# EAGLE board CT_schematic (EAGLE 7.6.0)

Size 100 x 80 mm. Coordinates in mm from the lower left corner, seen from the top.
Outline: 0,0 100,0 100,80 0,80 0,0
Copper layers (1*16): Top 0.035mm / dielectric 1.5mm / Bottom 0.035mm
Design rules "default": minimum track width 10mil, minimum drill 24mil, track to track 8mil, track to pad 8mil, pad to pad 8mil, via to via 8mil, smd to smd 8mil, copper to edge 40mil, drill to drill 8mil, minimum pad ring 10mil, minimum via ring 8mil, stop-mask expansion 4mil, vias tented up to drill 0mil, thermal gap 10mil

## Footprints (pad centres in the part's own frame; a part is rotated, then mirrored left to right if it is on the bottom)
C0603 = smd 0.8 x 0.8: 1 -0.762,0; 2 0.762,0
C0402 = smd 0.5 x 0.5: 1 -0.508,0; 2 0.508,0
EXV-9B = smd 2.718 x 1.778: 1 -2.108,0; 2 2.108,0
C1206 = smd 1.3 x 1.6: 1 -1.524,0; 2 1.524,0
L0603 = smd 0.8 x 0.8: 1 -0.762,0; 2 0.762,0
L1210 = smd 1.2 x 2.5: 1 -1.524,0; 2 1.524,0
R0603 = smd 0.8 x 0.8: 1 -0.762,0; 2 0.762,0
LQFP64 = smd 0.3 x 1.2: 1 -3.75,-5.75; 2 -3.25,-5.75; 3 -2.75,-5.75; 4 -2.25,-5.75; 5 -1.75,-5.75; 6 -1.25,-5.75; 7 -0.75,-5.75; 8 -0.25,-5.75; 9 0.25,-5.75; 10 0.75,-5.75; 11 1.25,-5.75; 12 1.75,-5.75; 13 2.25,-5.75; 14 2.75,-5.75; 15 3.25,-5.75; 16 3.75,-5.75; 33 3.75,5.75; 34 3.25,5.75; 35 2.75,5.75; 36 2.25,5.75; 37 1.75,5.75; 38 1.25,5.75; 39 0.75,5.75; 40 0.25,5.75; 41 -0.25,5.75; 42 -0.75,5.75; 43 -1.25,5.75; 44 -1.75,5.75; 45 -2.25,5.75; 46 -2.75,5.75; 47 -3.25,5.75; 48 -3.75,5.75 | smd 1.2 x 0.3: 17 5.75,-3.75; 18 5.75,-3.25; 19 5.75,-2.75; 20 5.75,-2.25; 21 5.75,-1.75; 22 5.75,-1.25; 23 5.75,-0.75; 24 5.75,-0.25; 25 5.75,0.25; 26 5.75,0.75; 27 5.75,1.25; 28 5.75,1.75; 29 5.75,2.25; 30 5.75,2.75; 31 5.75,3.25; 32 5.75,3.75; 49 -5.75,3.75; 50 -5.75,3.25; 51 -5.75,2.75; 52 -5.75,2.25; 53 -5.75,1.75; 54 -5.75,1.25; 55 -5.75,0.75; 56 -5.75,0.25; 57 -5.75,-0.25; 58 -5.75,-0.75; 59 -5.75,-1.25; 60 -5.75,-1.75; 61 -5.75,-2.25; 62 -5.75,-2.75; 63 -5.75,-3.25; 64 -5.75,-3.75
SSOP-16 = smd 1.981 x 0.356: 1 -2.464,2.223; 2 -2.464,1.587; 3 -2.464,0.953; 4 -2.464,0.318; 5 -2.464,-0.318; 6 -2.464,-0.953; 7 -2.464,-1.587; 8 -2.464,-2.223; 9 2.464,-2.223; 10 2.464,-1.587; 11 2.464,-0.953; 12 2.464,-0.318; 13 2.464,0.318; 14 2.464,0.953; 15 2.464,1.587; 16 2.464,2.223
182-009-MALE = drill 1.194 pad 1.524 octagon: 1 -5.537,10.923; 2 -2.769,10.923; 3 0,10.923; 4 2.769,10.923; 5 5.537,10.923; 6 -4.153,8.08; 7 -1.384,8.08; 8 1.384,8.08; 9 4.153,8.08 | hole 3.048: -12.446,9.501; 12.446,9.501
DFN-10 = smd 0.965 x 0.305: 1 -1.321,1; 2 -1.321,0.5; 3 -1.321,0; 4 -1.321,-0.5; 5 -1.321,-1; 6 1.321,-1; 7 1.321,-0.5; 8 1.321,0; 9 1.321,0.5; 10 1.321,1
DFN-6 = smd 0.805 x 0.3: 1 -0.952,0.5; 2 -0.952,0; 3 -0.952,-0.5; 4 0.952,-0.5; 5 0.952,0; 6 0.952,0.5 | smd 0.61 x 1.42: 7 0,0
FCI_10118193-0001LF = smd 0.4 x 1.35: 1 -1.3,2.675; 2 -0.65,2.675; 3 0,2.675; 4 0.65,2.675; 5 1.3,2.675 | smd 1.6 x 1.4: 6 -3.2,2.45; 7 3.2,2.45 | smd 1.9 x 1.9: 8 -1.2,0; 9 1.2,0 | hole 0.5: -3.3,0; 3.3,0
SOT143B = smd 1 x 0.7: 1 -0.75,-1 | smd 0.6 x 0.7: 2 0.95,-1; 3 0.95,1; 4 -0.95,1
ABS07-32.768KHZ-7-T = smd 1.1 x 2.4: 1 -2.5,0; 2 0,0
ABLS-25.000MHZ-B2F-T = smd 5.6 x 2.8: 1 -3.81,0; 2 5.69,0
LP2954 = smd 1.6 x 0.6: 1 -2.475,1.905 | smd 1.55 x 0.6: 2 -2.475,0.635; 3 -2.475,-0.635; 4 -2.475,-1.905; 5 2.475,-1.905; 6 2.475,-0.635; 7 2.475,0.635; 8 2.475,1.905
DFN8_2X3MC = smd 0.813 x 0.305: 1 -1.398,0.75; 2 -1.398,0.25; 3 -1.398,-0.25; 4 -1.398,-0.75; 5 1.398,-0.75; 6 1.398,-0.25; 7 1.398,0.25; 8 1.398,0.75 | smd 1.753 x 1.549: 9 0,0
JST-2-SMD = smd 1 x 4.6: 1 -1,-3.7; 2 1,-3.7 | smd 1.6 x 3.4: NC1 -3.4,1.5; NC2 3.4,1.5
SON-6 = smd 0.55 x 0.3: 1 -0.355,0.5 | smd 0.52 x 0.3: 2 -0.37,0; 3 -0.37,-0.5; 4 0.37,-0.5; 5 0.37,0; 6 0.37,0.5
SW_4-1437565-2 = smd 1.4 x 2.1: 1 -2.23,4.55; 2 -2.23,-4.55; 3 2.23,4.55; 4 2.23,-4.55
LGM67K-G1J2-24-Z = smd 0.8 x 1.4: A -2,0; C 0,0
NC7SZ125M5X = smd 1.3 x 0.7: 1 -1.3,0.95; 2 -1.3,0; 3 -1.3,-0.95; 4 1.3,-0.95; 5 1.3,0.95
DUMMY_PACKAGE_144 = drill 0.3: 1 0,-1; 2 1.5,-1; 3 3,-1

## Placement (x,y rotation side)
C1  1e-07  [C0603]  -41.91,60.96 0 top  (outside the outline)
C2  1e-07  [C0603]  -45.72,60.96 0 top  (outside the outline)
C3  1e-07  [C0603]  -49.53,60.96 0 top  (outside the outline)
C4  1e-07  [C0603]  -53.34,60.96 0 top  (outside the outline)
C5  4.7e-06  [C0603]  -34.29,60.96 0 top  (outside the outline)
C6  1e-07  [C0603]  -57.15,60.96 0 top  (outside the outline)
C7  1e-08  [C0603]  -60.96,60.96 0 top  (outside the outline)
C8  1e-06  [C0603]  -64.77,60.96 0 top  (outside the outline)
C9  1e-11  [C0402]  -68.58,66.04 0 top  (outside the outline)
C10  1e-11  [C0402]  -15.24,71.12 0 top  (outside the outline)
C11  1e-11  [C0402]  -19.05,71.12 0 top  (outside the outline)
C12  1e-11  [C0402]  -22.86,71.12 0 top  (outside the outline)
C13  1e-06  [C0603]  -68.58,60.96 0 top  (outside the outline)
C14  1e-06  [C0603]  -15.24,66.04 0 top  (outside the outline)
C15  2.2e-07  [C0603]  -38.1,60.96 0 top  (outside the outline)
C16  1e-06  [C0603]  -19.05,66.04 0 top  (outside the outline)
C17  1e-06  [C0603]  -22.86,66.04 0 top  (outside the outline)
C18  1e-07  [C0402]  -26.67,71.12 0 top  (outside the outline)
C19  1e-07  [C0402]  -30.48,71.12 0 top  (outside the outline)
C20  1e-06  [C0603]  -26.67,66.04 0 top  (outside the outline)
C21  1e-07  [C0402]  -34.29,71.12 0 top  (outside the outline)
C22  1e-07  [C0402]  -38.1,71.12 0 top  (outside the outline)
C23  1e-07  [C0402]  -41.91,71.12 0 top  (outside the outline)
C24  1e-06  [EXV-9B]  -68.58,46.99 0 top  (outside the outline)
C25  2.2e-06  [EXV-9B]  -16.51,54.61 0 top  (outside the outline)
C26  1e-07  [C0402]  -45.72,71.12 0 top  (outside the outline)
C27  1e-05  [C1206]  -54.61,46.99 0 top  (outside the outline)
C28  1e-05  [C1206]  -60.96,46.99 0 top  (outside the outline)
C29  1e-08  [C0402]  -49.53,71.12 0 top  (outside the outline)
F1  240.0  [L0603]  -30.48,66.04 0 top  (outside the outline)
I1  1e-05  [L1210]  -48.26,46.99 0 top  (outside the outline)
R2  1000.0  [R0603]  -34.29,66.04 0 top  (outside the outline)
R4  4700.0  [R0603]  -38.1,66.04 0 top  (outside the outline)
R5  2200.0  [R0603]  -41.91,66.04 0 top  (outside the outline)
R6  2200.0  [R0603]  -45.72,66.04 0 top  (outside the outline)
R7  2200.0  [R0603]  -49.53,66.04 0 top  (outside the outline)
R8  2200.0  [R0603]  -53.34,66.04 0 top  (outside the outline)
R9  10000.0  [R0603]  -67.31,54.61 0 top  (outside the outline)
R10  100000.0  [R0603]  -36.83,54.61 0 top  (outside the outline)
R11  100000.0  [R0603]  -41.91,54.61 0 top  (outside the outline)
R12  100000.0  [R0603]  -46.99,54.61 0 top  (outside the outline)
R13  101022.32  [R0603]  -31.75,54.61 0 top  (outside the outline)
R14  100000.0  [R0603]  -52.07,54.61 0 top  (outside the outline)
R15  10000.0  [R0603]  -15.24,60.96 0 top  (outside the outline)
R16  10000.0  [R0603]  -20.32,60.96 0 top  (outside the outline)
R17  18000.0  [R0603]  -25.4,60.96 0 top  (outside the outline)
R18  470000.0  [R0603]  -57.15,54.61 0 top  (outside the outline)
R19  120000.0  [R0603]  -62.23,54.61 0 top  (outside the outline)
R20  2000.0  [R0603]  -57.15,66.04 0 top  (outside the outline)
R21  10000.0  [R0603]  -30.48,60.96 0 top  (outside the outline)
U1  STM32L152R8T6  [LQFP64]  -63.5,7.62 0 top  (outside the outline)
U2  LTC2804CGN-1#PBF  [SSOP-16]  -63.5,27.94 0 top  (outside the outline)
U3  182-009-113R531  [182-009-MALE]  -36.83,6.35 0 top  (outside the outline)
U4  MAG3110FCR1  [DFN-10]  -62.23,66.04 0 top  (outside the outline)
U5  SI7006-A20-IM  [DFN-6]  -71.12,69.85 0 top  (outside the outline)
U6  10118193-0001LF  [FCI_10118193-0001LF]  -35.56,38.1 0 top  (outside the outline)
U7  prtr5v0u2ax  [SOT143B]  -62.23,71.12 0 top  (outside the outline)
U8  ABS07-32.768KHZ-7-T  [ABS07-32.768KHZ-7-T]  -27.94,48.26 0 top  (outside the outline)
U9  ABLS-25.000MHZ-B2F-T  [ABLS-25.000MHZ-B2F-T]  -54.61,38.1 0 top  (outside the outline)
U10  LP2954AIMX/NOPB  [LP2954]  -25.4,39.37 0 top  (outside the outline)
U11  MCP73831T-2ACI/MC  [DFN8_2X3MC]  -20.32,74.93 0 top  (outside the outline)
U12  S2B-PH-SM4-TB(LF)(SN)  [JST-2-SMD]  -41.91,29.21 0 top  (outside the outline)
U13  TPS3895ADRYR  [SON-6]  -13.97,74.93 0 top  (outside the outline)
U14  4-1437565-2  [SW_4-1437565-2]  -27.94,27.94 0 top  (outside the outline)
U15  Q65110A2395  [LGM67K-G1J2-24-Z]  -36.83,46.99 0 top  (outside the outline)
U16  nc7sz125m5x  [NC7SZ125M5X]  -24.13,54.61 0 top  (outside the outline)
U17  Dummy  [DUMMY_PACKAGE_144]  -68.58,71.12 0 top  (outside the outline)

## Library data of the parts
C1-C29 F1 I1 R2 R4-R21 U1-U17 = circuit_tree

## Nets
CLK_CRYSTAL_U1_3: C9.1 U1.3 U8.1
CLK_CRYSTAL_U1_4: C10.1 U1.4 U8.2
CLK_CRYSTAL_U1_5: C11.1 U1.5 U9.1
CLK_CRYSTAL_U1_6: C12.1 U1.6 U9.2
GND: C1.2 C2.2 C3.2 C4.2 C5.2 C6.2 C7.2 C8.2 C9.2 C10.2 C11.2 C12.2 C13.2 C14.2 C16.2 C17.2 C18.2 C19.2 C20.2 C21.2 C22.2 C23.2 C24.2 C25.2 C26.2 C27.2 C28.2 C29.2 R2.2 R9.2 R14.2 R17.2 R19.2 R20.2 U1.12 U1.18 U1.31 U1.47 U1.63 U2.8 U3.5 U4.5 U4.10 U5.2 U5.7 U6.5 U6.6 U6.7 U6.8 U6.9 U7.1 U10.4 U11.6 U11.9 U12.2 U13.2 U15.C U16.1 U16.3 U17.1
INPUT_USBPOWER_5V: C27.1 R21.2 U6.1 U7.4 U11.1 U11.2
NET_U1_1: C6.1 U1.1
NET_U1_7: R4.1 U1.7 U16.4
NET_U1_13: C7.1 C8.1 F1.1 U1.13
NET_U1_29: R7.1 U1.29 U5.6
NET_U1_30: R8.1 U1.30 U5.1
NET_U1_58: R5.1 U1.58 U4.7
NET_U1_59: R6.1 U1.59 U4.6
NET_U1_60: R9.1 U1.60
NET_U1_61: U15.A
NET_U1_62: U14.3 U14.4
NET_U2_6: C13.1 U2.6
NET_U2_7: C15.1 I1.2 U2.7
NET_U2_9: C14.1 U2.9
NET_U2_10: C15.2 U2.10
NET_U2_11: R10.1 U2.11
NET_U3_2: U2.1 U3.2
NET_U3_3: U2.3 U3.3
NET_U3_7: U2.2 U3.7
NET_U3_8: U2.4 U3.8
NET_U4_1: C18.1 U4.1
NET_U4_4: C21.1 U4.4
NET_U10_3: R12.1 U10.3
NET_U10_5: R11.1 U10.5
NET_U10_7: R13.2 R14.1 U10.7
NET_U11_5: R21.1 U11.5
NET_U11_8: R20.1 U11.8
NET_U13_1: R16.1 R17.1 U13.1
NET_U13_3: R18.2 R19.1 U13.3
NET_U13_4: R15.1 U13.4 U16.2
NET_U14_1: R2.1 U14.1 U14.2
PROC_ADC_IN13: U1.11 U17.3
PROC_ADC_IN20: U1.35 U17.2
PROC_USART2_CTS: U1.14 U2.13
PROC_USART2_RTS: U1.15 U2.15
PROC_USART2_RX: U1.17 U2.16
PROC_USART2_TX: U1.16 U2.14
PROC_USB_DM: U6.2 U7.3
PROC_USB_DP: U6.3 U7.2
VCC_S1_3V7: C24.1 C28.1 R12.2 U10.8 U11.3 U11.4 U12.1
VCC_TIER1_2V5: C1.1 C2.1 C3.1 C4.1 C5.1 C16.1 C17.1 C19.1 C20.1 C22.1 C23.1 C25.1 C26.1 C29.1 F1.2 I1.1 R4.2 R5.2 R6.2 R7.2 R8.2 R10.2 R11.2 R13.1 R15.2 R16.2 R18.1 U1.19 U1.32 U1.48 U1.64 U2.5 U2.12 U4.2 U4.8 U5.5 U10.1 U13.6 U16.5

## Tracks (layer width: path | path; a pad name or v marks a point on that pad's centre or on a via)
CLK_CRYSTAL_U1_3  (2 unrouted)
CLK_CRYSTAL_U1_4  (2 unrouted)
CLK_CRYSTAL_U1_5  (2 unrouted)
CLK_CRYSTAL_U1_6  (2 unrouted)
GND  (59 unrouted)
INPUT_USBPOWER_5V  (5 unrouted)
NET_U1_1  (1 unrouted)
NET_U1_7  (2 unrouted)
NET_U1_13  (3 unrouted)
NET_U1_29  (2 unrouted)
NET_U1_30  (2 unrouted)
NET_U1_58  (2 unrouted)
NET_U1_59  (2 unrouted)
NET_U1_60  (1 unrouted)
NET_U1_62  (1 unrouted)
NET_U2_6  (1 unrouted)
NET_U2_7  (2 unrouted)
NET_U2_9  (1 unrouted)
NET_U2_10  (1 unrouted)
NET_U2_11  (1 unrouted)
NET_U3_2  (1 unrouted)
NET_U3_3  (1 unrouted)
NET_U3_7  (1 unrouted)
NET_U3_8  (1 unrouted)
NET_U4_1  (1 unrouted)
NET_U4_4  (1 unrouted)
NET_U10_3  (1 unrouted)
NET_U10_5  (1 unrouted)
NET_U10_7  (2 unrouted)
NET_U11_5  (1 unrouted)
NET_U11_8  (1 unrouted)
NET_U13_1  (2 unrouted)
NET_U13_3  (2 unrouted)
NET_U13_4  (2 unrouted)
NET_U14_1  (2 unrouted)
PROC_ADC_IN13  (1 unrouted)
PROC_ADC_IN20  (1 unrouted)
PROC_USART2_CTS  (1 unrouted)
PROC_USART2_RTS  (1 unrouted)
PROC_USART2_RX  (1 unrouted)
PROC_USART2_TX  (1 unrouted)
PROC_USB_DM  (1 unrouted)
PROC_USB_DP  (1 unrouted)
VCC_S1_3V7  (6 unrouted)
VCC_TIER1_2V5  (38 unrouted)